# Altium PCB Flyback.PcbDoc (part 2 of 2)
Units mm, origin at the board's own origin, x right, y up, seen from the top; angles counter-clockwise.
Board outline 152.4 x 101.6 mm, 2 copper layers (Top Layer, Bottom Layer), stack 1.671 mm thick; 32 components, 22 nets, 89 pads, 0 vias.
Unrouted connection lines stored in the file: 58.
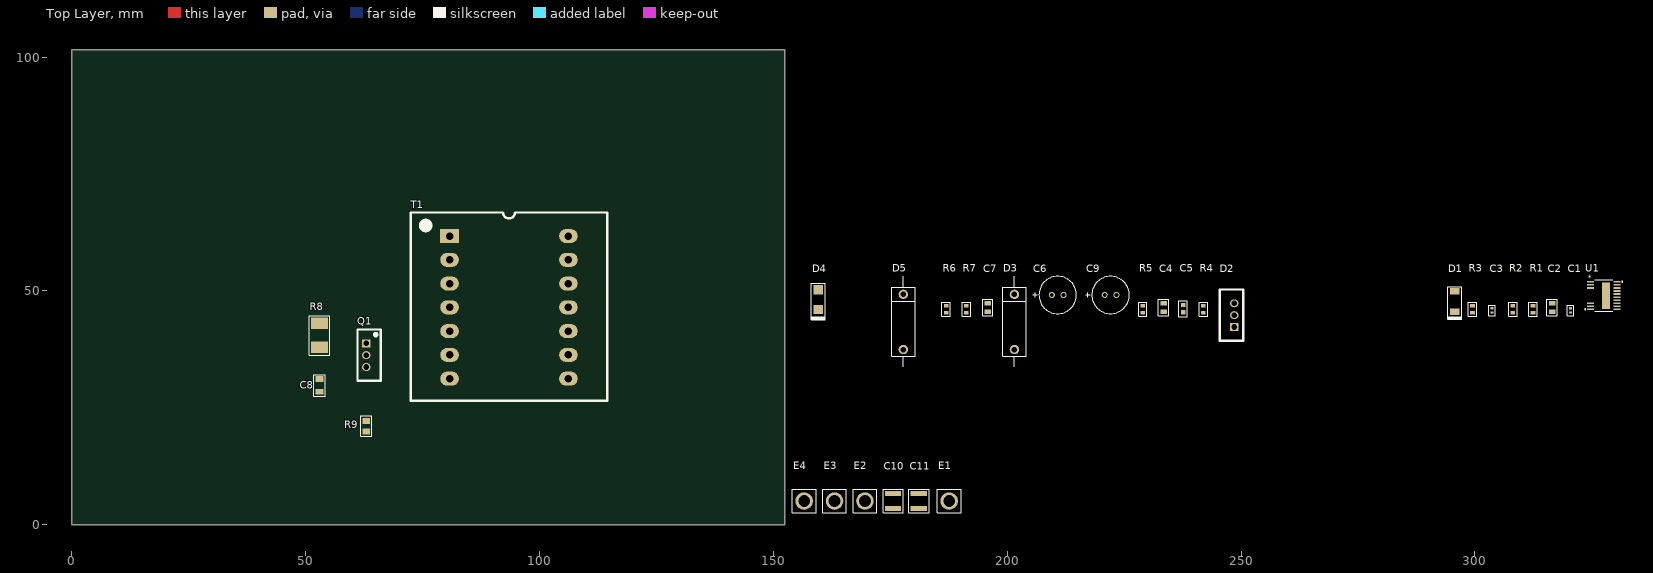
[diagram p0: Top Layer view]

## Part data (continued)
U1: "DC/DC Cntrlr Single-OUT 142kHz Automotive 16-Pin TSSOP EP Tube", Manufacturer="Analog Devices / Linear Technology", Manufacturer Part Number=LT8316EFE#PBF, Supplier Part Number 1=LT8316EFE#PBF-ND, Pricing 1="1=5,81000, 10=5,22200, 25=4,93680, 100=4,27870, 250=4,05928, 500=3,64238, 1000=3,10500 (USD)", RoHS=Yes, Supplier 1=Digi-Key

## Nets (pads, with @x,y where several pads share a name; then routed paths per layer and width w, separated by ;. In a path a pad name is that pad's centre, name@x,y a point inside that pad or via, vN(x,y) a via of type N, cw(c..) or ccw(c..) an arc to the next point about the centre after c; other vN are vias at no path point)
BIAS: C4.2 D1.1 U1.9
DCM: R5.1 U1.10
EN/UVLO: C2.2 U1.8 U1.17
FB: R4.1 R6.2 R7.2 U1.12
GATE: Q1.1 U1.19
GND: C2.1 C4.1 C10.1 C11.1 E2.1 R1.1 R2.1 R7.1 R9.1 T1.3 U1.15 U1.16 U1.20
GND-SAFE: C6.2 C7.1 C9.2 E4.1 T1.11
IREG//SS: R2.2 U1.14
NetC1_1: C1.1 R1.2
NetC3_1: C3.1 D2.1 D2.3 T1.14
NetC3_2: C3.2 R3.1
NetC5_1: C5.1 R5.2
NetC5_2: C5.2 D1.2 R4.2 T1.1
NetC6_1: C6.1 C7.2 C9.1 D2.2 E3.1 R3.2
NetC8_1: C8.1 R8.2
NetC8_2: C8.2 D4.2 Q1.2 T1.7
NetD3_1: D3.1 D5.2
NetD4_1: D4.1 D5.1
SENSE: Q1.3 R8.1 R9.2 U1.18
TC: R6.1 U1.11
VC: C1.2 U1.13
VIN: C10.2 C11.2 D3.2 E1.1 T1.5 U1.1 U1.2 U1.3
pads on no net: T1.2 T1.4 T1.6 T1.8 T1.9 T1.10 T1.12 T1.13 U1.EPAD

## Text inside footprints (layer, text, board x,y; h text height)
U1: Top Overlay "*" at 324.136,52.171 h1.27; Mechanical 13 "*" at 325.396,50.926 h1.27